# EAGLE board L2-SMALL (EAGLE 7.2.0)
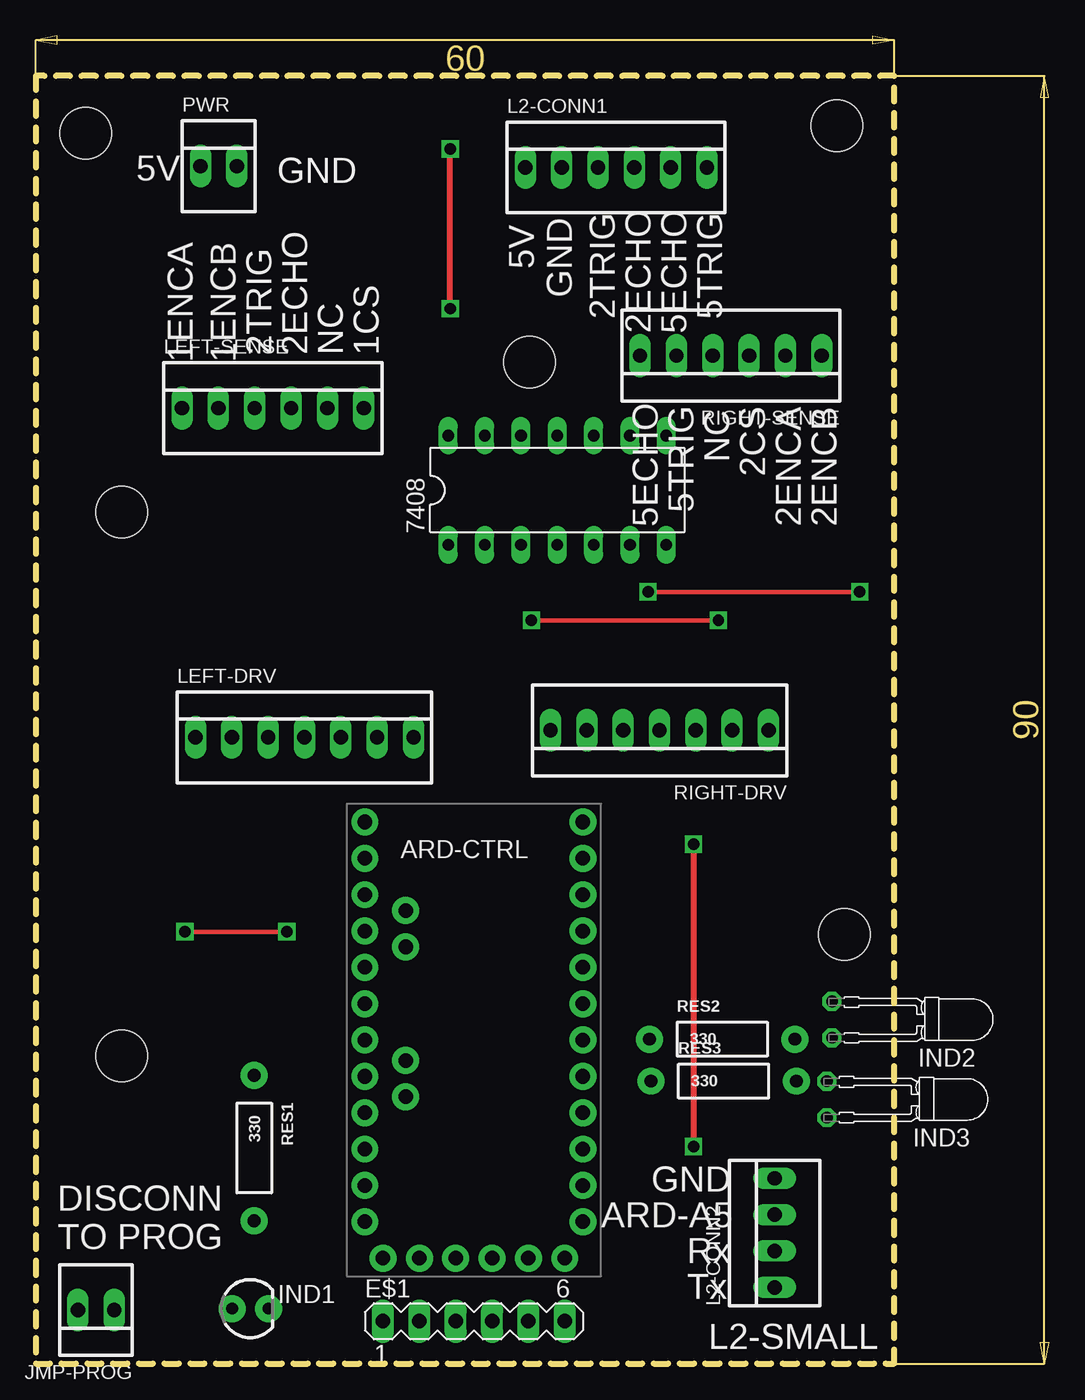
[diagram p0: board, top side]
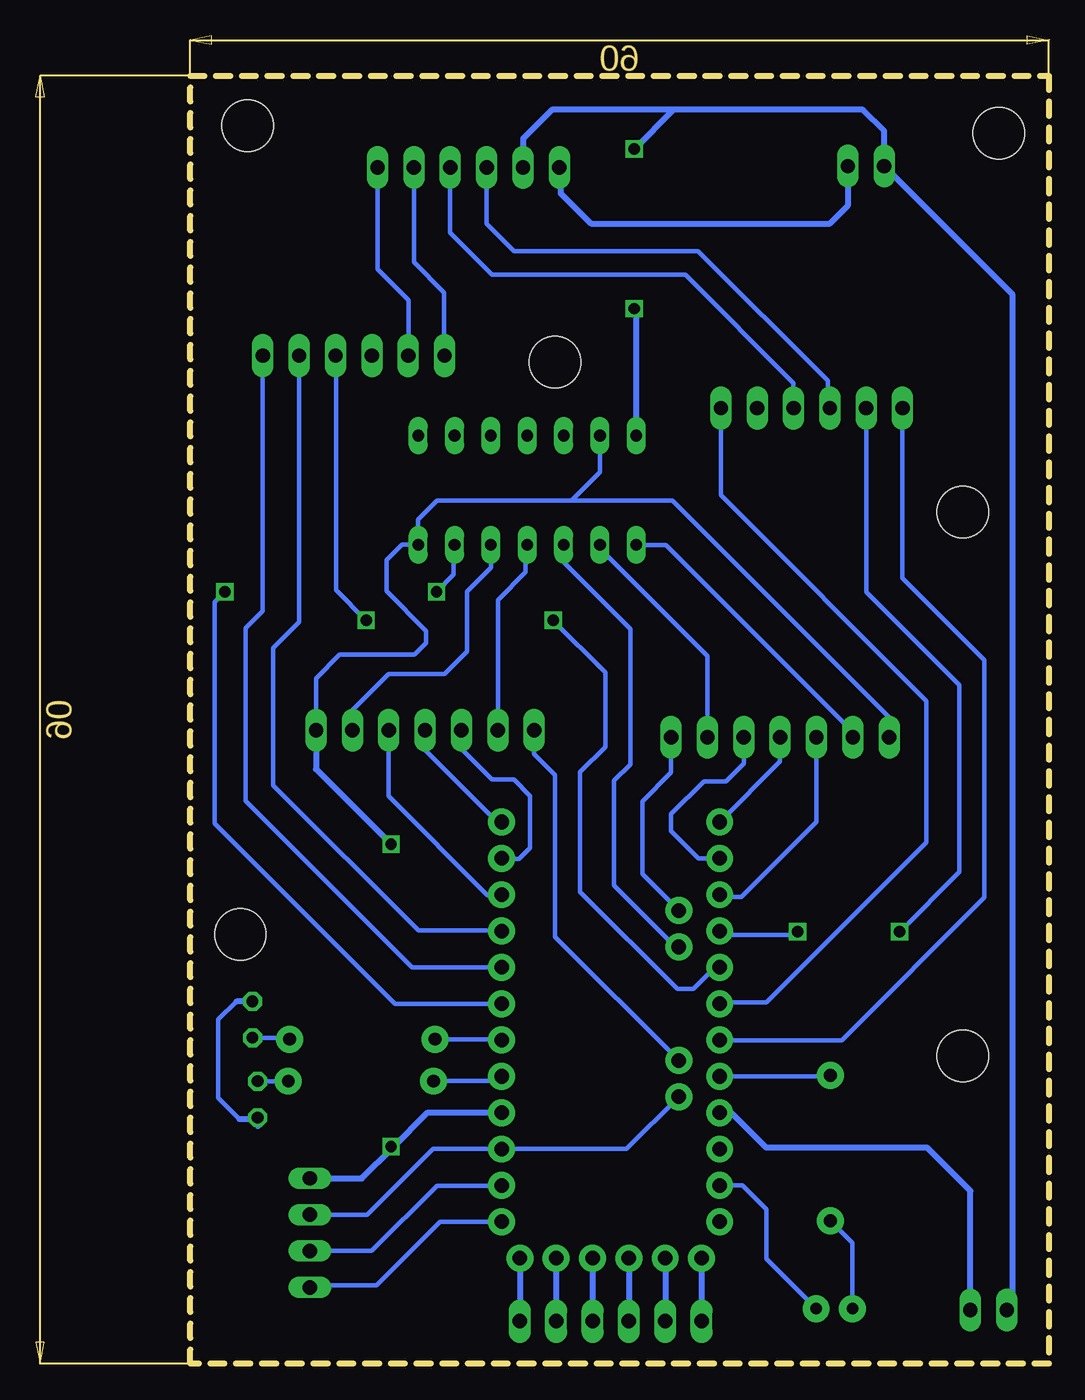
[diagram p1: board, bottom side, seen from below]

Size 60 x 90 mm. Coordinates in mm from the lower left corner, seen from the top.
Outline: 0,0 60,0 60,90 0,90 0,0
Copper layers (1*16): Top 0.035mm / dielectric 1.5mm / Bottom 0.035mm
Design rules "default": minimum track width 10mil, minimum drill 24mil, track to track 8mil, track to pad 8mil, pad to pad 8mil, via to via 8mil, smd to smd 8mil, copper to edge 40mil, drill to drill 8mil, minimum pad ring 10mil, minimum via ring 8mil, stop-mask expansion 4mil, vias tented up to drill 0mil, thermal gap 10mil
Holes 3.6 mm at 3.5,86 56,86.5 6,59.5 6,21.5 56.5,30 34.5,70

## Footprints (pad centres in the part's own frame; a part is rotated, then mirrored left to right if it is on the bottom)
DIL14 = drill 0.813 long: 1 -7.62,-3.81; 2 -5.08,-3.81; 3 -2.54,-3.81; 4 0,-3.81; 5 2.54,-3.81; 6 5.08,-3.81; 7 7.62,-3.81; 8 7.62,3.81; 9 5.08,3.81; 10 2.54,3.81; 11 0,3.81; 12 -2.54,3.81; 13 -5.08,3.81; 14 -7.62,3.81
ARDUINO_PRO_MINI = drill 1.016 pad 1.88: 1 -7.62,12.7; 2 -7.62,10.16; 3 -7.62,7.62; 4 -7.62,5.08; 5 -7.62,2.54; 6 -7.62,0; 7 -7.62,-2.54; 8 -7.62,-5.08; 9 -7.62,-7.62; 10 -7.62,-10.16; 11 -7.62,-12.7; 12 -7.62,-15.24; 13 7.62,-15.24; 14 7.62,-12.7; 15 7.62,-10.16; 16 7.62,-7.62; 17 7.62,-5.08; 18 7.62,-2.54; 19 7.62,0; 20 7.62,2.54; 21 7.62,5.08; 22 7.62,7.62; 23 7.62,10.16; 24 7.62,12.7; A4 4.763,1.429; A5 4.763,3.969; A6 4.763,-9.049; A7 4.763,-6.509; BLK -6.35,15.24; GND -3.81,15.24; GRN 6.35,15.24; RXI 1.27,15.24; TXO 3.81,15.24; VCC -1.27,15.24
MA06-1 = drill 1.016 long: 1 -6.35,0; 2 -3.81,0; 3 -1.27,0; 4 1.27,0; 5 3.81,0; 6 6.35,0
LED3MM = drill 0.813 pad 1.88: A -1.27,0; K 1.27,0
LED3MM_H7,5MM = drill 0.813 pad 1.27 octagon: A 0,-1.27; K 0,1.27
22-23-2021 = drill 1 long: 1 -1.27,0; 2 1.27,0
22-23-2061 = drill 1 long: 1 -6.35,0; 2 -3.81,0; 3 -1.27,0; 4 1.27,0; 5 3.81,0; 6 6.35,0
22-23-2041 = drill 1 long: 1 -3.81,0; 2 -1.27,0; 3 1.27,0; 4 3.81,0
22-23-2071 = drill 1 long: 1 -7.62,0; 2 -5.08,0; 3 -2.54,0; 4 0,0; 5 2.54,0; 6 5.08,0; 7 7.62,0
AXIAL-0.4 = drill 0.9 pad 1.88: P$1 -5.08,0; P$2 5.08,0

## Placement (x,y rotation side)
7408  [DIL14]  36.45,61.05 0 top
ARD-CTRL  [ARDUINO_PRO_MINI]  30.62,22.62 180 top
E$1  [MA06-1]  30.62,2.97 0 top
IND1  [LED3MM]  14.99,3.85 0 top
IND2  [LED3MM_H7,5MM]  55.65,24.05 180 top
IND3  [LED3MM_H7,5MM]  55.29,18.47 180 top
JMP-PROG  [22-23-2021]  4.21,3.75 180 top
L2-CONN1  female berg  [22-23-2061]  40.56,83.6 0 top
L2-CONN2  female berg  [22-23-2041]  51.64,9.14 90 top
LEFT-DRV  [22-23-2071]  18.78,43.77 0 top
LEFT-SENSE  [22-23-2061]  16.57,66.78 0 top
PWR  [22-23-2021]  12.78,83.69 0 top
RES1  330  [AXIAL-0.4]  15.27,15.08 270 top
RES2  330  [AXIAL-0.4]  47.98,22.68 0 top
RES3  330  [AXIAL-0.4]  48.07,19.75 0 top
RIGHT-DRV  [22-23-2071]  43.59,44.26 180 top
RIGHT-SENSE  [22-23-2061]  48.58,70.45 180 top

## Library data of the parts
7408 = 40xx
ARD-CTRL = SparkFun-Boards
E$1 = con-lstb
IND1 = SparkFun-LED
IND2 IND3 = led
JMP-PROG L2-CONN1 L2-CONN2 LEFT-DRV LEFT-SENSE PWR RIGHT-DRV RIGHT-SENSE = con-molex
RES1-RES3 = SparkFun-Passives

## Nets
S$1: ARD-CTRL.A6 LEFT-DRV.7
S$2: 7408.14 JMP-PROG.2 L2-CONN1.2 PWR.1
S$3: ARD-CTRL.10 RIGHT-DRV.3
S$4: ARD-CTRL.12 RIGHT-DRV.4
S$5: ARD-CTRL.11 RIGHT-DRV.5
S$6: ARD-CTRL.9 RIGHT-SENSE.2
S$7: 7408.3 ARD-CTRL.A7
S$8: ARD-CTRL.13 LEFT-DRV.4
S$9: 7408.6 ARD-CTRL.7
S$10: ARD-CTRL.14 LEFT-DRV.5
S$11: L2-CONN1.4 LEFT-SENSE.4
S$12: 7408.1 LEFT-DRV.2
S$13: 7408.2 LEFT-DRV.6
S$14: 7408.4 RIGHT-DRV.6
S$15: 7408.5 RIGHT-DRV.2
S$16: ARD-CTRL.15 LEFT-DRV.3
S$17: ARD-CTRL.19 LEFT-SENSE.1
S$18: ARD-CTRL.16 LEFT-SENSE.2
S$19: ARD-CTRL.18 LEFT-SENSE.6
S$20: ARD-CTRL.17 RIGHT-SENSE.3
S$21: ARD-CTRL.BLK E$1.6
S$22: ARD-CTRL.GND E$1.5
S$23: ARD-CTRL.VCC E$1.4
S$24: ARD-CTRL.RXI E$1.3
S$25: ARD-CTRL.TXO E$1.2
S$26: ARD-CTRL.GRN E$1.1
S$27: ARD-CTRL.A4 RIGHT-DRV.7
S$28: ARD-CTRL.8 RIGHT-SENSE.1
S$29: L2-CONN1.1 PWR.2
S$30: L2-CONN1.3 LEFT-SENSE.3
S$31: L2-CONN1.6 RIGHT-SENSE.5
S$32: L2-CONN1.5 RIGHT-SENSE.6
S$33: IND2.A IND3.K
S$34: ARD-CTRL.21 JMP-PROG.1
S$35: ARD-CTRL.1 L2-CONN2.1
S$36: ARD-CTRL.2 L2-CONN2.2
S$37: ARD-CTRL.A5 L2-CONN2.3
S$38: ARD-CTRL.20 RES1.P$1
S$39: IND1.A RES1.P$2
S$40: ARD-CTRL.23 IND1.K
S$41: ARD-CTRL.6 RES2.P$1
S$42: ARD-CTRL.5 RES3.P$1
S$43: IND2.K RES2.P$2
S$44: IND3.A RES3.P$2
S$45: 7408.7 7408.13 ARD-CTRL.4 L2-CONN2.4 LEFT-DRV.1 RIGHT-DRV.1

## Tracks (layer width: path | path; a pad name or v marks a point on that pad's centre or on a via)
S$1
  Bottom 0.305: LEFT-DRV.7 26.4,41.31 28.41,39.3 28.41,34.22 ARD-CTRL.A6
S$2  (via drill 0.8 pad 0.41)
  Top 0.406: v28.97,73.73 v28.97,84.89
  Bottom 0.406: 26.23,87.63 12.98,87.63 11.51,86.16 PWR.1 2.52,74.7 2.52,4.17 JMP-PROG.2 | 26.23,87.63 34.73,87.63 36.74,85.62 L2-CONN1.2 | 7408.14 28.83,73.59 v28.97,73.73 | v28.97,84.89 26.23,87.63
S$3
  Bottom 0.305: RIGHT-DRV.3 46.13,39.66 39.21,32.74 38.28,32.74 ARD-CTRL.10
S$4
  Bottom 0.305: RIGHT-DRV.4 43.59,42.88 38.75,38.04 38.42,38.04 ARD-CTRL.12
S$5
  Bottom 0.305: RIGHT-DRV.5 41.05,42.95 38.92,40.82 37.39,40.82 36.25,39.68 36.25,36.03 37.02,35.26 38.18,35.26 ARD-CTRL.11
S$6
  Bottom 0.305: RIGHT-SENSE.2 52.39,51.84 54.2,50.03 54.2,40.42 44.05,30.27 38.27,30.27 ARD-CTRL.9
S$7
  Bottom 0.305: ARD-CTRL.A7 26.08,29.13 30.39,33.44 30.39,40.75 29.25,41.89 29.25,51.34 33.97,56.06 33.97,57.18 7408.3
S$8
  Bottom 0.305: LEFT-DRV.4 18.78,42.08 ARD-CTRL.13
S$9  (via drill 0.8 pad 0.41)
  Top 0.305: v57.59,53.94 v42.79,53.94
  Bottom 0.305: ARD-CTRL.7 45.7,25.16 58.31,37.77 58.31,53.22 v57.59,53.94 | 7408.6 41.59,57.18 41.59,55.14 v42.79,53.94
S$10
  Bottom 0.305: LEFT-DRV.5 21.32,41.96 22.58,40.7 24.12,40.7 26.41,38.41 26.41,37.22 24.49,35.3 23.02,35.3 ARD-CTRL.14
S$11
  Bottom 0.305: LEFT-SENSE.4 17.84,68.53 25.41,76.1 38.93,76.1 41.86,79.03 41.86,83.57 L2-CONN1.4
S$12
  Bottom 0.305: LEFT-DRV.2 13.7,44.15 26.75,57.2 28.79,57.2 7408.1
S$13
  Bottom 0.305: 7408.2 31.37,56.95 23.86,49.44 LEFT-DRV.6
S$14
  Bottom 0.305: RIGHT-DRV.6 38.51,53.38 36.56,55.33 36.56,57.13 7408.4
S$15
  Bottom 0.305: 7408.5 38.99,55.64 40.67,53.96 40.67,49.76 42.23,48.2 46.15,48.2 48.81,45.54 48.81,44.4 RIGHT-DRV.2
S$16
  Bottom 0.305: LEFT-DRV.3 16.24,37.86 21.47,32.63 22.85,32.63 ARD-CTRL.15
S$17
  Bottom 0.305: LEFT-SENSE.1 10.22,54.9 4.5,49.18 4.5,32.59 14.48,22.61 22.37,22.61 22.48,22.72 22.9,22.72 ARD-CTRL.19
S$18  (via drill 0.8 pad 0.41)
  Top 0.305: v10.42,30.19 v17.55,30.19
  Bottom 0.305: LEFT-SENSE.2 12.76,53.93 6.25,47.42 6.25,34.36 v10.42,30.19 | v17.55,30.19 17.77,29.97 22.73,29.97 ARD-CTRL.16
S$19
  Bottom 0.305: LEFT-SENSE.6 22.92,60.69 8.55,46.32 8.55,36.44 19.74,25.25 22.91,25.25 ARD-CTRL.18
S$20  (via drill 0.8 pad 0.41)
  Top 0.305: v34.64,51.95 v47.71,51.95
  Bottom 0.305: v47.71,51.95 49.81,54.05 49.81,70.41 RIGHT-SENSE.3 | ARD-CTRL.17 23.33,27.7 24.83,26.2 25.97,26.2 32.75,32.98 32.75,41.36 31,43.11 31,48.31 v34.64,51.95
S$21
  Bottom 0.406: ARD-CTRL.BLK E$1.6
S$22
  Bottom 0.406: ARD-CTRL.GND E$1.5
S$23
  Bottom 0.406: ARD-CTRL.VCC E$1.4
S$24
  Bottom 0.406: ARD-CTRL.RXI E$1.3
S$25
  Bottom 0.406: ARD-CTRL.TXO E$1.2
S$26
  Bottom 0.406: ARD-CTRL.GRN E$1.1
S$27
  Bottom 0.305: RIGHT-DRV.7 35.97,42.6 34.5,41.13 34.5,29.83 ARD-CTRL.A4
S$28
  Bottom 0.305: RIGHT-SENSE.1 54.93,52.59 56.12,51.4 56.12,39.32 44.51,27.71 ARD-CTRL.8
S$29
  Bottom 0.406: L2-CONN1.1 34.12,83.69 34.12,81.8 31.99,79.67 15.3,79.67 14.05,80.92 PWR.2
S$30
  Bottom 0.305: L2-CONN1.3 39.29,79.66 37.38,77.75 24.51,77.75 15.45,68.69 15.45,66.93 LEFT-SENSE.3
S$31
  Bottom 0.305: L2-CONN1.6 46.91,76.5 44.75,74.34 44.75,70.47 RIGHT-SENSE.5
S$32
  Bottom 0.305: L2-CONN1.5 44.37,76.98 42.25,74.86 42.25,70.47 RIGHT-SENSE.6
S$33
  Bottom 0.305: 56.77,25.32 58.04,24.05 58.04,18.57 56.57,17.1
  Bottom 0.406: IND2.A 56.77,25.32 | 56.57,17.1 55.39,17.1 IND3.K 55.29,16.6
S$34
  Bottom 0.406: 22.51,18.03 ARD-CTRL.21 22.93,17.47 22.12,17.47 19.74,15.09 8.5,15.09 5.48,12.07 JMP-PROG.1
S$35
  Bottom 0.305: ARD-CTRL.1 42.55,9.92 46.98,5.49 51.48,5.49 L2-CONN2.1
S$36
  Bottom 0.305: L2-CONN2.2 47.34,7.87 42.77,12.44 38.26,12.44 ARD-CTRL.2
S$37
  Bottom 0.305: L2-CONN2.3 47.64,10.41 43.05,15 29.51,15 ARD-CTRL.A5
S$38
  Bottom 0.305: ARD-CTRL.20 15.35,20.08 RES1.P$1
S$39
  Bottom 0.305: RES1.P$2 13.72,8.45 IND1.A
S$40
  Bottom 0.305: IND1.K 19.74,7.33 19.74,10.79 21.41,12.46 ARD-CTRL.23
S$41
  Bottom 0.305: ARD-CTRL.6 38.3,22.68 RES2.P$1
S$42
  Bottom 0.305: ARD-CTRL.5 38.57,19.75 RES3.P$1
S$43
  Bottom 0.305: 53.16,22.78 IND2.K
  Bottom 0.406: RES2.P$2 53.16,22.78
S$44
  Bottom 0.305: RES3.P$2 IND3.A
  Bottom 0.406: RES3.P$2
S$45  (via drill 0.8 pad 0.41)
  Top 0.406: v45.97,36.31 v45.97,15.18
  Bottom 0.305: RIGHT-DRV.1 51.22,47.9 49.57,49.55 44.32,49.55 43.51,50.36 43.51,51.2 46.3,53.99 46.3,56.15 45.21,57.24 7408.7 44.07,59 42.75,60.32 33.36,60.32 | 7408.13 31.37,62.31 33.36,60.32 | 33.36,60.32 26.29,60.32 11.13,45.16 11.13,43.8 LEFT-DRV.1
  Bottom 0.406: RIGHT-DRV.1 51.21,41.55 v45.97,36.31 | ARD-CTRL.4 38.26,17.56 43.41,17.56 45.88,15.09 | 45.88,15.09 48.02,12.95 L2-CONN2.4 | v45.97,15.18 45.88,15.09

## Text on the board
tPlace: 5V | GND | 5V | GND | 2TRIG | 5TRIG | 2ECHO | 5ECHO | 1ENCA | 1ENCB | 2TRIG | 2ECHO | NC | 1CS | NC | 2CS | 5TRIG | 5ECHO | 2ENCA | 2ENCB | GND | ARD-A5 | DISCONN / TO PROG | Rx | Tx | L2-SMALL